# Altium PCB tinyCurrent_Version1.PcbDoc
Units mm, origin at the board's own origin, x right, y up, seen from the top; angles counter-clockwise.
Board outline 49.5 x 79.5 mm, 2 copper layers (Top Layer, Bottom Layer), stack 1.62 mm thick; 39 components, 22 nets, 110 pads, 4 vias.
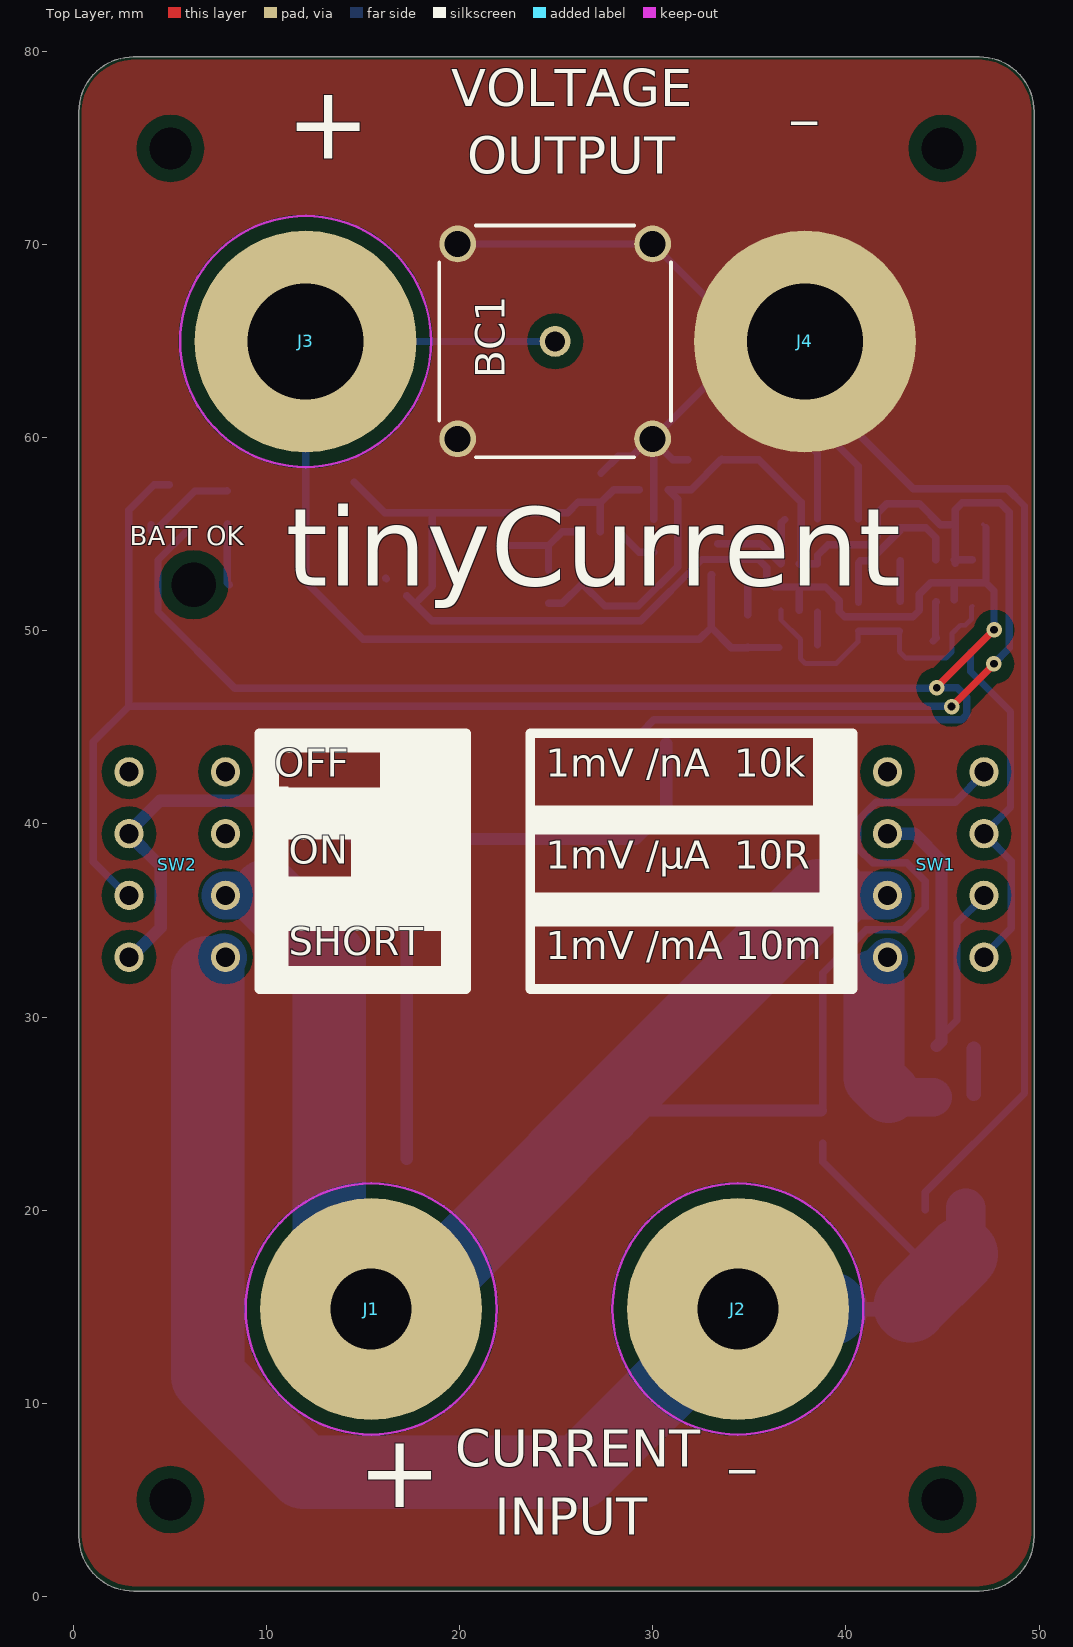
[diagram p0: Top Layer view]
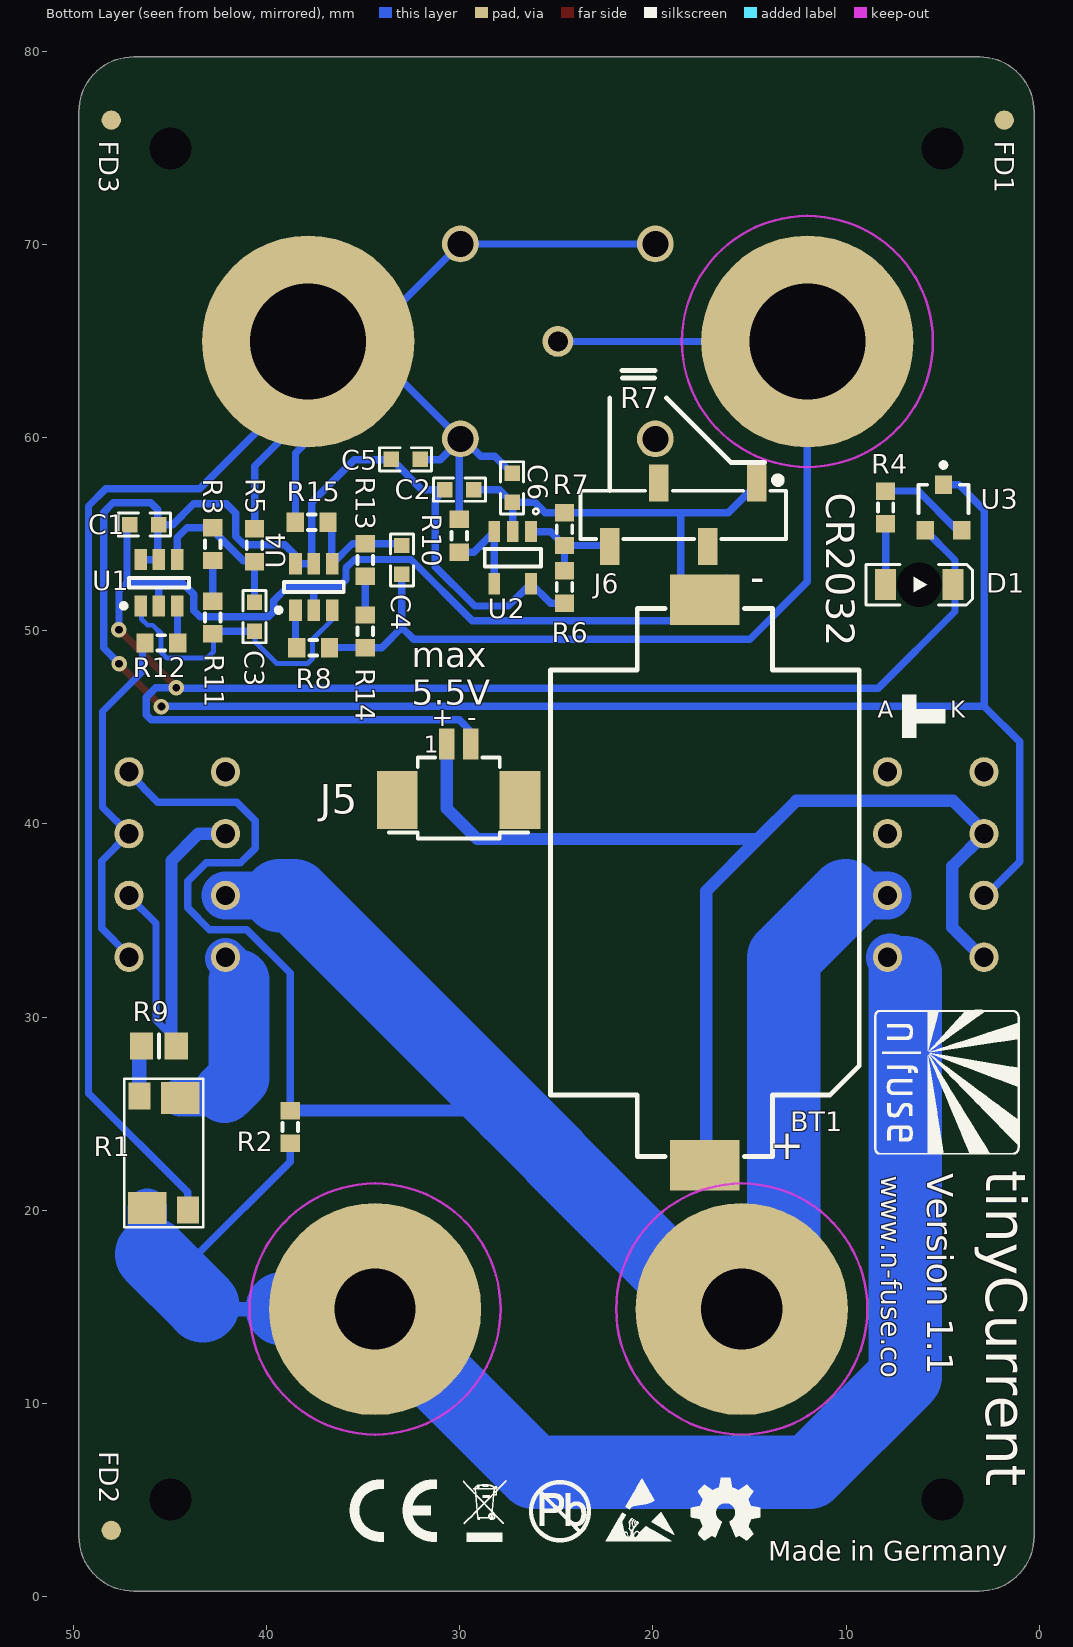
[diagram p1: Bottom Layer view, seen from below]
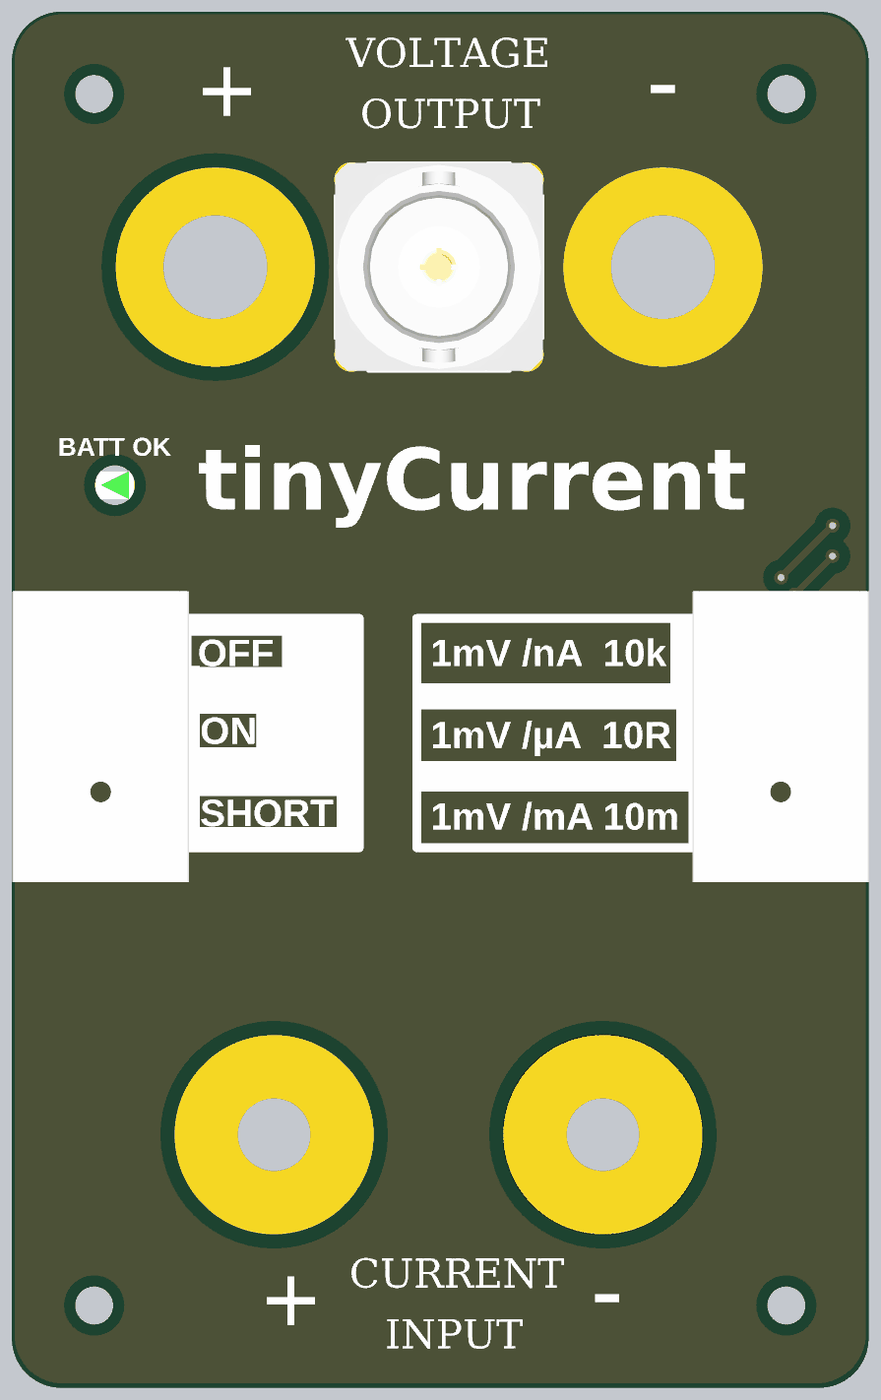
[diagram p2: 3D render of the assembled board from above, using the file's embedded part models]

## Layer stack, top to bottom
Top Solder: solder mask 0.01, Solder Resist, Dk 3.5
Top Layer: signal copper 0.035
Dielectric1: dielectric 1.55, FR-4, Dk 4.8
Bottom Layer: signal copper 0.035
Bottom Solder: solder mask 0.01, Solder Resist, Dk 3.5

## Board outline
0.25,3.1 0.25,76.9 cw(c3.1,76.9) 3.1,79.75 46.9,79.75 cw(c46.9,76.9) 49.75,76.9 49.75,3.1 cw(c46.9,3.1) 46.9,0.25 3.1,0.25 cw(c3.1,3.1)

## Design rules (kind name [scope] priority, off if disabled: settings)
Clearance Clearance_6 [OnLayer('Top Layer') vs OnLayer('Keep-Out Layer')] p1: gap=0.635 ignorepadtopadclearanceinfootprint=FALSE except(0: Arc-Arc Arc-Track Arc-SMDPad Arc-THPad Arc-Via Arc-Fill Arc-Poly Arc-Region Arc-Text Arc-Hole Track-Track Track-SMDPad Track-THPad Track-Via Track-Fill Track-Poly Track-Region Track-Text Track-Hole SMDPad-Hole THPad-Hole Via-Hole Fill-Hole Poly-Hole Region-Hole Text-Hole)
Clearance Clearance_5 [OnLayer('Top Layer') vs OnLayer('Multi-Layer')] p2: gap=0.5 ignorepadtopadclearanceinfootprint=FALSE except(0: Arc-Hole Track-Hole SMDPad-Hole THPad-Hole Via-Hole Fill-Hole Poly-Hole Region-Hole Text-Hole; 0.635: SMDPad-Fill SMDPad-Poly SMDPad-Region SMDPad-Text THPad-Fill THPad-Poly THPad-Region THPad-Text Via-Fill Via-Poly Via-Region Via-Text Fill-Fill Fill-Poly Fill-Region Fill-Text Poly-Poly Poly-Region Poly-Text Region-Region Region-Text Text-Text)
Clearance Clearance_4 [OnLayer('Multi-Layer') vs OnLayer('Multi-Layer')] p3: gap=0.635 ignorepadtopadclearanceinfootprint=FALSE except(0: Arc-Hole Track-Hole SMDPad-Hole THPad-Hole Via-Hole Fill-Hole Poly-Hole Region-Hole Text-Hole; 0.3: THPad-THPad Via-Via)
Clearance Clearance_3 [OnLayer('Bottom Layer') vs OnLayer('Multi-Layer')] p4: gap=0 ignorepadtopadclearanceinfootprint=FALSE except(0.3: SMDPad-Via THPad-Via; 0.635: SMDPad-SMDPad SMDPad-Fill SMDPad-Poly SMDPad-Region SMDPad-Text THPad-THPad THPad-Fill THPad-Poly THPad-Region THPad-Text Via-Via Via-Fill Via-Poly Via-Region Via-Text Fill-Fill Fill-Poly Fill-Region Fill-Text Poly-Poly Poly-Region Poly-Text Region-Region Region-Text Text-Text)
Clearance Clearance_2 [OnLayer('Bottom Layer') vs OnLayer('Keep-Out Layer')] p5: gap=0.635 ignorepadtopadclearanceinfootprint=FALSE except(0: Arc-Arc Arc-Track Arc-SMDPad Arc-THPad Arc-Via Arc-Fill Arc-Poly Arc-Region Arc-Text Arc-Hole Track-Track Track-SMDPad Track-THPad Track-Via Track-Fill Track-Poly Track-Region Track-Text Track-Hole SMDPad-Hole THPad-Hole Via-Hole Fill-Hole Poly-Hole Region-Hole Text-Hole)
Clearance Clearance_1 [OnLayer('Bottom Layer') vs OnLayer('Bottom Layer')] p6: gap=0.635 ignorepadtopadclearanceinfootprint=FALSE except(0: Arc-Hole Track-Hole SMDPad-Hole THPad-Hole Via-Hole Fill-Hole Poly-Hole Region-Hole Text-Hole; 0.1: Arc-Arc Arc-Track Arc-SMDPad Arc-THPad Arc-Via Track-Track Track-SMDPad Track-THPad Track-Via; 0.3: Arc-Text Track-Text SMDPad-SMDPad SMDPad-THPad THPad-THPad)
Clearance [All] p7: gap=0.635 ignorepadtopadclearanceinfootprint=FALSE except(0: Arc-Hole Track-Hole SMDPad-Hole THPad-Hole Via-Hole Fill-Hole Poly-Hole Region-Hole Text-Hole)
ComponentClearance ComponentClearance_6 [InComponent('J5')] p1: gap=0 collisioncheckmode=3 verticalgap=0 showdistances=FALSE
ComponentClearance ComponentClearance_5 [InComponent('R1')] p2: gap=0 collisioncheckmode=3 verticalgap=0 showdistances=FALSE
ComponentClearance ComponentClearance_4 [InComponent('J4')] p3: gap=0 collisioncheckmode=3 verticalgap=0 showdistances=FALSE
ComponentClearance ComponentClearance_3 [InComponent('J3')] p4: gap=0 collisioncheckmode=3 verticalgap=0 showdistances=FALSE
ComponentClearance ComponentClearance_2 [InComponent('J2')] p5: gap=0 collisioncheckmode=3 verticalgap=0 showdistances=FALSE
ComponentClearance ComponentClearance_1 [InComponent('J1')] p6: gap=0 collisioncheckmode=3 verticalgap=0 showdistances=FALSE
ComponentClearance [All] p7: gap=0.254 collisioncheckmode=3 verticalgap=0.254 showdistances=FALSE
FabricationTestPointUsage TestPointUsage [All] p1: valid=0 allowmultiple=FALSE
FabricationTestpoint Testpoint [All] p1: side=3 testpointundercomponent=TRUE minsize=1.016 maxsize=2.54 preferedsize=1.524 minholesize=0 maxholesize=1.016 preferedholesize=0.813 testpointgrid=0.025 allowsidetop=TRUE allowsidebottom=TRUE usegrid=TRUE gridtolerance=0
HoleSize [All] p1: absolutevalues=TRUE maxlimit=5 minlimit=0.025 maxpercent=80.000 minpercent=20.000
PolygonConnect [All] p1: connectstyle=Direct reliefconductorwidth=0.254 reliefentries=4 polygonreliefangle="90 Angle" airgapwidth=0.254
RoutingVias [All] p1: holewidth=0.4 width=0.8 viastyle="Through Hole" minholewidth=0.4 minwidth=0.8 maxholewidth=0.4 maxwidth=0.8
SilkToSolderMaskClearance SilkscreenOverComponentPads [IsPad] p1: minsilkscreentomaskgap=0.254 clearancetoexposedcopper=TRUE
SolderMaskExpansion [All] p1: expansion=0.051
Width [All] p1: maxlimit=3.81 minlimit=0.203 preferedwidth=0.381 minimp=50.000000 maximp=50.000000 favimp=50.000000
25 further rules are at their usual default settings.

## Components (designator, comment, footprint, x,y, rotation, side; value= is the part's Value field where it differs from the comment)
BC1 "J01001A1944" ROS-51K101-400A4_V 24.928,65.006 r90 top
BT1 "79527141" 79527141 17.315,36.969 r270 bottom
C1 "0u1 16V" "WCAP-CSGP_0603, 1.6x0.8x0.8" 46.356,55.512 r180 bottom value=100000pF
C2 "0u1 16V" "WCAP-CSGP_0603, 1.6x0.8x0.8" 30.032,57.325 r180 bottom value=100000pF
C3 "10pF" "WCAP-CSGP_0603, 1.6x0.8x0.8" 40.647,50.743 r270 bottom
C4 "10pF" "WCAP-CSGP_0603, 1.6x0.8x0.8" 33.011,53.68 r270 bottom
C5 "0u1 16V" "WCAP-CSGP_0603, 1.6x0.8x0.8" 32.817,58.892 r0 bottom value=100000pF
C6 "0u1 16V" "WCAP-CSGP_0603, 1.6x0.8x0.8" 27.302,57.417 r90 bottom value=100000pF
D1 "156120GS75000" "WL-SMRW_1206 rectangular_Normal use" 6.2,52.4 r0 bottom
FD1 "FIDUCIAL1X2" FIDUCIAL-1X2#1 0.1,76.4 r90 bottom
FD2 "FIDUCIAL1X2" FIDUCIAL-1X2#2 1.7,3.4 r90 bottom
FD3 "FIDUCIAL1X2" FIDUCIAL-1X2#3 38.7,4 r90 bottom
J1 "4mmBindingPostRed" PIN1#1 15.4,13.9 r0 top locked
J2 "4mmBindingPostBlack" PIN1#2 34.4,13.9 r0 top locked
J3 "4mmBindingPostRed" PIN1#3 15.8,60.7 r0 top locked
J4 "4mmBindingPostBlack" PIN1#4 29.2,70.9 r0 top
J5 "1.25mm JST Connector" 653102131822 30.066,41.353 r180 bottom
J6 "61000413321" 61000413321 18.43,56.016 r0 bottom
R1 "0R01 0.1%" 2512shuntresistor 44.5,25.8 r0 bottom
R2 "10K 0.05%" RESC1608N 38.8,24.3 r270 bottom
R3 "6K8 0.05%" RESC1608N 42.813,54.5 r270 bottom
R4 "470R" RESC1608N 7.95,56.4 r90 bottom
R5 "1K 0.05%" RESC1608N 40.647,54.444 r90 bottom
R6 "100K 1%" RESC1608N 24.585,52.281 r270 bottom
R7 "100K 1%" RESC1608N 24.585,55.281 r90 bottom
R8 "270R" RESC1608N 37.611,49.129 r0 bottom
R9 "10R 0.05%" RESC2012N 45.6,28.5 r0 bottom
R10 "270R" RESC1608N 30.043,54.937 r270 bottom
R11 "2K2 0.05%" RESC1608N 42.813,50.7 r270 bottom
R12 "270R" RESC1608N 45.47,49.383 r180 bottom
R13 "6K8 0.05%" RESC1608N 34.911,53.68 r270 bottom
R14 "2K2 0.05%" RESC1608N 34.911,49.98 r270 bottom
R15 "1K 0.05%" RESC1608N 37.686,55.631 r0 bottom
SW1 "MFP 230" "MFP 230" 45.15,38 r270 top
SW2 "MFP 230" "MFP 230" 5.85,38 r270 top
U1 "MAX4239AUT" SOT-23-CH6_N 45.6,52.5 r90 bottom
U2 "LMV321ILT" SOT95P280X130-5N 27.27,53.799 r270 bottom
U3 "STM809RWX6F" SOT23 4.95,56.4 r180 bottom
U4 "MAX4239AUT" SOT-23-CH6_N 37.572,52.28 r90 bottom

## Footprints (in the part's own frame and the unit in brackets; to place one, negate y for a bottom-side part, rotate by r counter-clockwise, add the part's x,y. Pads: shape width x height; smd on the part's side, far side on the other; paste and mask are expansions set on the pad)
2512shuntresistor [mm]
  rect 2x1.65 smd mask+0.051: 1(0,0) 2(1.7,5.7)
  rect 1.15x1.4 smd mask+0.051: 3(2.1,-0.1) 4(-0.4,5.8)
  silkscreen extent -1.2,-1 2.9,6.7
79527141 [mm] "Battery Holder"
  rect 2.6x3.6 smd: 1(14.65,0) 2(-14.65,0)
  silkscreen extent -14.2,-8 14.2,8, body extent -15.95,-8 15.95,8, height 5.66
61000413321 [mm] "SMT Socket Header, pitch 2.54mm, 4p"
  rect 1x1.91 smd: 1(-3.81,-1.645) 2(-1.27,1.645) 3(1.27,-1.645) 4(3.81,1.645)
  silkscreen extent -5.33,-1.9 5.33,1.25, body extent -5.33,-2.02 5.33,2.03, height 7.5
653102131822 [mm] "1.25mm SMT Male Horizontal Shrouded Header, 2p"
  rect 0.81x1.6 smd: 1(-0.625,2.8) 2(0.625,2.8)
  rect 2.1x3 smd: M1(-3.175,-0.1) M2(3.175,-0.1)
  silkscreen extent -3.6,-2.1 3.61,2.1, body extent -3.63,-2.1 3.62,3.3, height 3.43
FIDUCIAL-1X2#1 [mm]
  rrect100% 1x1 smd paste-0.5: 1(0.07,1.7)
FIDUCIAL-1X2#2 [mm]
  rrect100% 1x1 smd paste-0.5: 1(0,46.37)
FIDUCIAL-1X2#3 [mm]
  rrect100% 1x1 smd paste-0.5: 1(72.47,9.37)
"MFP 230" [mm] "MFP 230 Slide Switch"
  round 1.524 hole 1: 1A(4.9,-3) 1B(4.9,2) 2A(1.7,-3) 2B(1.7,2) 3A(-1.5,-3) 3B(-1.5,2) 4A(-4.7,-3) 4B(-4.7,2)
  body extent -8.27,-5.57 8.53,4.62, height 11.01
PIN1#1 [mm] "Connector; Plug"
  round 11.5 / inner round 10 / far side round 11 hole 4.2 mask+0: 1(0,0.97)
  body extent -5.68,-4.83 5.88,6.75
PIN1#2 [mm] "Connector; Plug"
  round 11.5 / inner round 10 / far side round 11 hole 4.2: 1(0,0.97)
  body extent -5.77,-4.79 5.9,6.82
PIN1#3 [mm] "Connector; Plug"
  round 11.5 / inner round 10 / far side round 11 hole 6 mask+0: 1(-3.8,4.3)
  body extent -9.15,-1.45 2.35,10.05
PIN1#4 [mm] "Connector; Plug"
  round 11.5 / inner round 10 / far side round 11 hole 6 mask+0: 1(8.67,-5.9)
  body extent 3.95,-11.65 15.45,-0.15
RESC1608N [mm] "Chip Resistor, Body 1.6x0.8mm, IPC Medium Density"
  rect 0.9x1 smd: 1(-0.85,0) 2(0.85,0)
  silkscreen extent -0.2,-0.4 0.2,0.4, body extent -0.85,-0.48 0.85,0.48, height 0.6
RESC2012N [mm] "Chip Resistor, Body 2.0x1.3mm, IPC Medium Density"
  rect 1.2x1.4 smd: 1(-0.9,0) 2(0.9,0)
  silkscreen extent 0,-0.6 0,0.6, body extent -1.07,-0.7 1.07,0.7, height 0.65
ROS-51K101-400A4_V [mm]
  round 1.6 hole 1.05: 1(0,0)
  round 1.9 hole 1.35: MH(-5.05,-5.05) MH(-5.05,5.05) MH(5.05,-5.05) MH(5.05,5.05)
  silkscreen extent -6,-6 6,6, body extent -6,-6 6,6, height 15
SOT23 [mm] "SOT-23; 3 Leads; Body 3.1 x 2.5 mm, inc. leads (LxW max), Alternate Lead Configuration"
  rect 0.9x0.95 smd: 1(0,1.175) 2(0.95,-1.175) 3(-0.95,-1.175)
  silkscreen extent -1.3,-0.3 1.3,2.32
SOT95P280X130-5N [mm] "LMV321AS5X"
  rect 1.1x0.6 smd paste-25.4 mask-25.4: 1(-1.35,0.95) 2(-1.35,0) 3(-1.35,-0.95) 4(1.35,-0.95) 5(1.35,0.95)
  silkscreen extent -2.54,-1.46 0.45,1.46, body extent -1.52,-1.5 1.68,1.5, height 0.92
SOT-23-CH6_N [mm]
  rect 1.1x0.65 smd: 1(-1.2,0.95) 2(-1.2,0) 3(-1.2,-0.95) 4(1.2,-0.95) 5(1.2,0) 6(1.2,0.95)
  silkscreen extent -1.32,-1.55 0.25,1.95, body extent -0.9,-1.55 0.9,1.55, height 1.45
"WCAP-CSGP_0603, 1.6x0.8x0.8" [mm] "WCAP-CSGP Ceramic Capacitors, size 0603, body 1.6x0.8x0.8"
  rect 0.8x0.8 smd: 1(-0.75,0) 2(0.75,0)
  silkscreen extent -1.35,-0.6 1.35,0.6, body extent -0.8,-0.4 0.8,0.4, height 0.8
"WL-SMRW_1206 rectangular_Normal use" [mm] "SMD Mono-color Reverse mount LED, body 3.2x1.2mm"
  rect 1.1x1.6 smd: 1(-1.75,0) 2(1.75,0)
  silkscreen extent -2.75,-1.05 2.75,1.05, body extent -1.6,-0.8 1.6,0.8, height 1.2

## Part data
BC1: library part 51K101-400A4, "BNC 50R Straight Jack, Up to 10 GHz, -55 to 155 degC", ComponentLink1Description="Manufacturer URL", ComponentLink1URL=http://www.rosenberger.de, ComponentLink2Description=Datasheet, ComponentLink2URL=http://rosenberger.de/ok/images/documents/db/51K101-400A4.pdf, ComponentLink3Description="Package Specification", ComponentLink3URL=http://rosenberger.de/ok/images/documents/db/51K101-400A4.pdf, ComponentLink4Description="URL Link1", ComponentLink4URL="Series Overview / Design Note:http://rosenberger.de/ok/images/documents/spez/51.pdf", ComponentLink5Description="Webshop / RFQ", ComponentLink5URL=http://www.rosenberger.com/en/contact/sales/, DatasheetVersion=c00, Design Note="Footprint in library is a generic example - only application specific footprint delivers High Performance", Mounting Technology="Through Hole", PackageDescription="50R BNC Straight Jack, 12 x 12 x 15 mm", PackageReference=51K101-400A4, PackageVersion=c00, PartNumber=51K101-400A4
BT1: "Battery Holder WA-BCPH, Battery Type: 2032p", BatteryType=2032, ComponentLink1Description=Manufacturer, ComponentLink1URL=http://www.we-online.de, ComponentLink2Description=Datasheet, ComponentLink2URL=http://katalog.we-online.de/em/datasheet/79527141.pdf, PartNumber=79527141, PublishedDate="Nov. 2016", Publisher="Wurth Elektronik"
C1 C2 C5 C6: library part "WCAP-CSGP, 885012206046", "WCAP-CSGP Ceramic Capacitors, 0603, 100000pF", PartNumber=885012206046, RatedVoltage="16V DC", CeramicType=X7R, ComponentLink1Description=Manufacturer, ComponentLink1URL=http://www.we-online.de, ComponentLink2Description=Datasheet, ComponentLink2URL=http://katalog.we-online.com/pbs/datasheet/885012206046.pdf, PublishedDate="Aug 2016", Publisher="Wurth Elektronik", Size=0603
C3 C4: library part "WCAP-CSGP, 885012006051", "WCAP-CSGP Ceramic Capacitors, 0603, 10pF", PartNumber=885012006051, RatedVoltage="50V DC", CeramicType=NP0, ComponentLink1Description=Manufacturer, ComponentLink1URL=http://www.we-online.de, ComponentLink2Description=Datasheet, ComponentLink2URL=http://katalog.we-online.com/pbs/datasheet/885012006051.pdf, PublishedDate="Aug 2016", Publisher="Wurth Elektronik", Size=0603
D1: "WL-SMRW SMD Mono-color Reverse mount Waterclear, size 1206 rectangular, Green", EmittingColor=Green, ForwardVoltage="3.3 V", ComponentLink1Description=Manufacturer, ComponentLink1URL=http://www.we-online.de, ComponentLink2Description=Datasheet, ComponentLink2URL=http://katalog.we-online.de/led/datasheet/156120GS75000.pdf, PartNumber=156120GS75000, PeakWavelength="520 nm", PublishedDate="Jan. 2017", Publisher="Wurth Elektronik", Size="1206 rectangular", ViewingAngle=140°
FD1 FD2 FD3: "Fiducial Alignment Points    Point-of-reference for pick-and-place machines and other optical instruments."
J5: library part 653102131822, "WR-WTB 1.25mm SMT Male Horizontal Shrouded Header, 2p", ComponentLink1Description=Manufacturer, ComponentLink1URL=http://www.we-online.de, ComponentLink2Description=Datasheet, ComponentLink2URL=http://katalog.we-online.de/em/datasheet/6531xx131822.pdf, Part Number=653102131822, Pin Number=2, Pitch="1.25 mm", Published Date="June 2017", Publisher="Wurth Elektronik"
J6: "WR-PHD 2.54 mm SMT Socket Header, 4p", Rated Current=3A, Withstanding Voltage="500V AC", Working Voltage="250V AC", ComponentLink1Description=Manufacturer, ComponentLink1URL=http://www.we-online.de, ComponentLink2Description=Datasheet, ComponentLink2URL=http://katalog.we-online.de/em/datasheet/6100xx13321.pdf, Part Number=61000413321, Pin Number=4, Pitch=2.54mm, Published Date="August 2017", Publisher="Wurth Elektronik"
R1: library part 1206currentShunt, "1206 Current Shunt"
R2 R3 R4 R5 R6 R7 R8 R9 R10 R11 R12 R13 R14 R15: library part D-100-0004, Power Rating="125 mW", Resistance="75 R", Tolerance="1 %", Category=Resistor, Mounting Technology="Surface Mount", Status=Production
SW1 SW2: "Slide Switch"
U1 U4: library part MCP6273T-E/CH, "170 uA, 2 MHz Rail-to-Rail Operational Amplifier, 6-Pin SOT-23, Extended Temperature, Tape and Reel", Supplier Part Number 1=MCP6273T-E/CHTR-ND, Code_IPC=SOT26A-6, ComponentLink1Description=Datasheet, ComponentLink1URL=http://ww1.microchip.com/downloads/en/DeviceDoc/21810f.pdf, ComponentLink2Description="Packaging Specification", ComponentLink2URL=http://www.microchip.com/stellent/groups/techpub_sg/documents/packagingspec/en012702.pdf, ComponentLink3Description="Microchip.com Home", ComponentLink3URL=http://www.microchip.com/, DatasheetVersion="revF, Mar-2008", PackageDescription="6-Lead Plastic Small Outline Transistor (CH) [SOT-23]", PackageReference=SOT-23-CH6, PackageVersion="revBB, Aug-2009", Published=29-Jan-2009, Publisher="Altium Limited", Supplier 1=Digi-Key, Supplier 2=Digi-Key, Supplier 3=Digi-Key, Supplier Part Number 2=MCP6273T-E/CHCT-ND, Supplier Part Number 3=MCP6273T-E/CHDKR-ND
U2: library part Component_1_1
U3: library part VoltageSupervisor

## Free pads (board coordinates)
  round 0 hole 2.3 unplated paste+2.032 mask+1.05: 0(6.2,52.4)
  round 0 hole 2.2 unplated: 1(5,5) 2(45,5) 3(5,75) 4(45,75)
  round 0 on Mech16 paste+0 mask+0: 1(21.2,53.746)

## Via types
v1: diameter 0.8, hole 0.4, Top Layer to Bottom Layer, tented both sides, 4 vias

## Nets (pads, with @x,y where several pads share a name; then routed paths per layer and width w, separated by ;. In a path a pad name is that pad's centre, name@x,y a point inside that pad or via, vN(x,y) a via of type N, cw(c..) or ccw(c..) an arc to the next point about the centre after c; other vN are vias at no path point)
+IN: J1.1 R2.1 SW1.2A SW1.4B SW2.2B | length 102.7
  Top Layer w0.381: SW1.4B@47.102,42.7 SW1.4B@47.3,42.7
  Bottom Layer w0.381: 26.35,25.15 27.461,25.15 ; R2.1@38.7,25.15 38.75,25.2 38.8,25.25 38.8,32.278 41.051,34.529 42.982,34.529 44.115,35.662 44.115,37.028 43.152,37.991 41.372,37.991 40.615,38.748 40.615,40.173 41.57,41.128 45.653,41.128 47.172,42.647 SW1.4B@47.239,42.647
  Bottom Layer w0.635: 27.461,25.15 R2.1@38.7,25.15
  Bottom Layer w2.5: SW2.2B 10,36.3 ; 39.358,36.3 SW1.2A
  Bottom Layer w2.54: 10,36.3 10.006,36.294 ; 39.347,36.289 39.358,36.3
  Bottom Layer w3.81: 10.006,36.294 13.218,33.082 13.218,16.927 15.329,14.816 17.175,14.816 25.029,22.669 25.029,22.718 27.461,25.15 38.6,36.289 39.347,36.289
+V: C1.2 C2.1 C5.2 R6.2 SW2.2A U1.5 U1.6 U2.5 U3.1 U4.5 U4.6 | length 120.2
  Top Layer w0.381: v1(45.469,46.083) 47.666,48.28 v1(47.666,48.301)
  Bottom Layer w0.203: U4.5 U4.5@37.672,53.58
  Bottom Layer w0.381: SW2.2A@2.5,36.3 2.5,36.55 1,38.05 1,44.259 2.83,46.088 2.83,46.093 ; 2.83,56.248 2.83,46.093 ; 2.83,56.259 4.146,57.575 U3.1 ; R6.2 25.302,51.431 U2.5 26.339,52.449 27.493,51.295 29.238,51.295 31.275,53.332 31.275,56.832 C2.1 31.974,57.325 C5.2@33.519,58.87 ; C5.2@33.554,58.905 C5.2@33.519,58.87 ; U4.5 U4.6 38.522,53.917 39.076,54.47 41.184,54.47 41.613,54.9 41.613,56.1 42.107,56.594 43.806,56.594 44.888,55.512 C1.2 ; U4.5@37.672,53.58 37.672,56.68 35.482,58.87 C5.2@33.519,58.87 ; v1(45.469,46.083) 45.552,46.083 45.563,46.093 45.527,46.129 45.491,46.093 2.83,46.093 ; U1.5 U1.5@45.656,53.7 ; U1.5@45.656,53.512 U1.5@45.656,53.7 ; U1.6 U1.5@45.656,53.7 ; v1(47.666,48.301) 47.65,48.301 48.466,49.116 48.466,56.159 47.981,56.645 46.015,56.645 45.657,56.286 45.657,55.563 C1.2 ; C1.2 45.656,55.462 U1.5@45.656,53.7
-IN: J2.1 R1.2 R2.2 SW2.1B | length 80.9
  Top Layer w3.81: J2.1@34.29,15.055 J2.1@34.46,15.055
  Bottom Layer w0: 40.853,14.836 40.88,14.863
  Bottom Layer w0.381: J2.1@33.798,14.893 J2.1 ; R2.2 38.8,22.5 43.6,17.7 45.607,17.7 45.973,17.7 ; 43.186,14.863 43.238,14.915
  Bottom Layer w0.75: 40.88,14.863 43.186,14.863
  Bottom Layer w2.032: 45.607,17.7 46.2,18.293 R1.2
  Bottom Layer w2.5: 6.924,32.301 SW2.1B@7.704,33.081
  Bottom Layer w3.81: 6.924,32.301 6.924,11.389 11.895,6.419 26.19,6.419 34.427,14.656 34.427,14.658 34.334,14.693 33.798,14.893 J2.1@39.219,14.893 ; J2.1@34.584,16.104 J2.1@34.668,16.167 ; 43.324,15.051 45.973,17.7
-V: BT1.2 C1.1 C2.2 C6.1 D1.1 J5.2 J6.1 R7.2 U1.2 U2.2 U3.3 U4.2 | length 136.4
  Top Layer w0.381: v1(44.696,47.061) 44.696,47.03 44.681,47.015 44.648,47.048 44.658,47.048 v1(47.671,50.061) v1@47.661,50.061
  Bottom Layer w0.203: 45.6,52.5 45.602,52.502 ; C1.1 C1.1@47.256,55.362
  Bottom Layer w0.381: U3.3 4.35,53.675 4.35,51.01 8.326,47.033 44.823,47.033 44.795,47.061 45.771,47.061 46.261,46.571 46.261,45.664 46.002,45.405 30.038,45.405 J5.2@29.4,44.767 ; J6.1@14.526,57.705 16.101,56.131 18.567,56.131 ; BT1.2@16.162,52.728 BT1.2@16.195,52.695 ; BT1.2@17.239,51.827 18.541,50.526 29.357,50.526 32.54,53.708 35.463,53.708 35.903,53.269 35.903,52.647 36.27,52.28 37.572,52.28 ; BT1.2@17.875,51.616 18.567,52.309 18.567,56.131 ; R7.2@24.385,56.131 R7.2 ; R7.2@24.599,56.116 R7.2 ; U2.2 27.27,56.634 C6.1 ; C2.2 27.961,57.325 C6.1 ; U4.2 37.572,52.28 ; U1.2@45.6,51.62 45.6,52.5 44.4,52.5 43.8,51.9 43.8,51.062 43.47,50.731 39.926,50.731 39.647,51.011 39.647,51.57 38.937,52.28 37.572,52.28 ; 45.602,52.502 47.2,52.502 ; C1.1@47.256,55.362 47.256,52.498 47.671,52.083 v1(47.671,50.061) ; 18.567,56.131 R7.2 ; R7.2 25.575,56.131 26.11,56.667 C6.1
B+: BT1.1 J5.1 SW2.1A SW2.3A | length 59
  Bottom Layer w0.381: SW2.3A@2.7,39.5 SW2.3A@2.8,39.5 ; SW2.1A@3.287,33.373 SW2.1A@3.287,33.434
  Bottom Layer w0.635: SW2.1A@2.5,33.1 2.572,33.1 SW2.1A@2.636,33.164 ; SW2.3A@2.5,39.5 2.619,39.5 2.66,39.54 2.735,39.615 2.85,39.615 2.865,39.615 4.45,41.2 12.572,41.2 14.553,39.219 ; SW2.3A@2.8,39.5 4.493,37.807 4.493,34.641 SW2.1A@3.287,33.434 ; BT1.1@17.244,22.649 17.244,36.528 14.553,39.219 ; J5.1 30.691,40.8 29.11,39.219 14.553,39.219
NetBC1_1: BC1.1 C4.2 J3.1 R8.1 R14.2 | length 55
  Bottom Layer w0.381: BC1.1@24.895,64.96 24.935,65 J3.1 12,52.549 14.976,49.573 32.404,49.573 33.011,50.18 ; C4.2 C4.2@33.011,52.918 ; C4.2@33.058,52.918 C4.2@33.011,52.918 ; R14.2 34.061,49.13 33.011,50.18 ; R14.2@34.91,49.156 34.911,49.156 R14.2@35.266,49.147 ; R14.2@34.911,49.173 34.914,49.173 R14.2@35.266,49.147 ; R8.1@36.528,49.147 R14.2@35.266,49.147 ; 33.011,50.18 C4.2@33.011,52.918
NetC3_1: C3.1 R3.1 R5.1 U1.4 | length 8.3
  Bottom Layer w0.203: R5.1@40.647,53.551 R5.1@40.647,53.558 ; R5.1@40.647,53.65 R5.1 R5.1@40.647,53.558 ; R5.1@40.724,53.635 R5.1@40.647,53.558 ; R3.1@42.813,55.216 R3.1
  Bottom Layer w0.381: C3.1 R5.1@40.647,53.551 ; R5.1@40.724,53.635 41.232,53.635 R3.1@42.813,55.216 ; R3.1 44.142,55.35 44.65,54.842 U1.4
NetC3_2: C3.2 R11.2 U1.1 U4.3 | length 16.1
  Bottom Layer w0.203: U1.1@46.5,51.25 U1.1
  Bottom Layer w0.254: U4.3 36.622,50.586 37.643,49.566 37.643,48.565 37.889,48.318 39.505,48.318 40.617,49.431 C3.2@40.617,49.926 ; C3.2 C3.2@40.653,49.987 ; R11.2@42.771,49.987 42.771,48.925 43.094,48.603 45.189,48.603 45.494,48.908 45.494,49.873 45.921,50.3 46.182,50.3 46.5,50.617 U1.1@46.5,51.25
  Bottom Layer w0.381: C3.2@40.653,49.987 R11.2@42.771,49.987
NetC4_1: C4.1 R13.1 R15.1 U4.4 | length 6.1
  Bottom Layer w0.381: C4.1@33.351,54.516 R13.1@34.951,54.516 ; R13.1@34.901,54.522 R13.1@34.909,54.531 ; R13.1 35.572,54.53 U4.4 36.65,53.507 36.65,55.607 R15.1@36.822,55.78
NetD1_2: D1.2 R4.1 | length 3.2
  Bottom Layer w0.381: R4.1 7.945,55.545 7.945,52.505 8,52.45 D1.2@8.05,52.4
NetJ6_4: J6.4 R6.1 R7.1 U2.1 | length 5.7
  Bottom Layer w0.381: J6.4@22.146,54.415 J6.4@22.162,54.431 ; J6.4 22.3,54.431 R7.1 ; R6.1 R7.1 ; U2.1 25.303,55.149 R7.1
NetR1_1: R1.1 SW1.1A | length 9.7
  Bottom Layer w1.27: 41.232,32.113 41.448,31.898 ; SW1.1A@42.15,33.031 SW1.1A
  Bottom Layer w2: 42.589,25.843 R1.1@44.489,25.843
  Bottom Layer w2.1: 41.232,32.113 SW1.1A@42.15,33.031
  Bottom Layer w3.175: 41.448,31.898 41.448,26.852 42.2,26.1
NetR1_3: R1.3 R9.2 | length 2.4
  Bottom Layer w0.75: R1.3@46.608,26.011 R9.2@46.608,28.361
NetR3_2: R3.2 R11.1 | length 2.1
  Bottom Layer w0.381: R11.1 R3.2
NetR4_2: R4.2 U3.2 | length 5.1
  Bottom Layer w0.381: U3.2@4,55.5 U3.2 4.237,55.225 6.262,57.25 R4.2 R4.2@7.93,57.27
NetR8_2: R8.2 U4.1 | length 1.7
  Bottom Layer w0.381: R8.2@38.522,49.289 U4.1@38.522,50.97
NetR9_1: R9.1 SW1.2B SW1.3A | length 21.3
  Bottom Layer w0.381: R9.1@45.037,28.937 45.037,29.116 45.753,29.832 45.753,34.854 47.137,36.238 47.15,36.238 SW1.2B@47.3,36.238
  Bottom Layer w0.635: SW1.3A@42.3,39.5 43.543,39.5 44.945,38.097 44.945,28.745 R9.1
NetR10_2: R10.2 U2.3 U2.4 | length 5
  Bottom Layer w0.381: U2.4 U2.3 29.282,54.087 R10.2
NetR12_1: R12.1 SW1.1B SW1.3B | length 18.4
  Bottom Layer w0.254: R12.1@46.449,48.899 R12.1@46.45,48.9 ; SW1.3B@47.223,39.573 47.297,39.5 47.297,39.474 SW1.3B@47.237,39.413
  Bottom Layer w0.381: R12.1@46.449,48.899 46.449,47.902 48.524,45.827 48.524,40.874 SW1.3B@47.223,39.573 ; SW1.1B@47.212,33.054 47.212,33.237 48.567,34.592 48.567,38.083 SW1.3B@47.237,39.413
NetR12_2: R12.2 U1.3 | length 2.2
  Bottom Layer w0.381: R12.2@44.52,49.483 44.685,49.647 44.635,49.647 44.635,51.491 U1.3@44.668,51.524
NetR13_2: R13.2 R14.1 | length 2
  Bottom Layer w0.381: R14.1 R13.2
VGND: BC1.MH C5.1 C6.2 J4.1 R1.4 R5.2 R10.1 R15.2 | length 108
  Bottom Layer w0.381: BC1.MH@19.885,70.05 29.985,70.05 34.95,65.085 35.291,65.085 35.376,65 J4.1 ; C6.2 28.191,59.055 28.931,59.055 29.831,59.956 BC1.MH@29.978,59.956 ; R10.1 BC1.MH@30.043,59.843 ; C5.1@31.807,58.87 31.017,58.87 BC1.MH@30.043,59.843 ; J4.1@35.035,65 29.985,59.95 29.985,59.901 BC1.MH@30.043,59.843 ; R15.2@38.522,55.8 38.522,59.218 37.87,59.87 J4.1@37.87,61.317 ; 40.64,55.808 40.64,58.547 J4.1@37.87,61.317 ; R1.4 44.115,20.015 44.115,20.912 49.246,26.043 49.246,56.474 48.357,57.363 43.482,57.363 37.97,62.876 37.97,65.1 J4.1 ; J4.1@37.87,61.317 J4.1
pads on no net: FD1.1 FD2.1 FD3.1 J5.M1 J5.M2 J6.2 J6.3 SW1.4A SW2.3B SW2.4A SW2.4B

## Polygon pours and split planes (outlines as drawn)
VGND on Top Layer "GND_pour" (solid, pour order 8): 46.874,79.6 cw(c46.874,76.874) 49.6,76.874 49.6,3.392 cw(c46.708,3.392) 46.708,0.5 3.191,0.5 cw(c3.191,3.291) 0.4,3.291 0.4,76.857 cw(c3.143,76.857) 3.143,79.6

## Keep-outs
Keep-Out Layer:
  circle w0.127: c34.4,14.87 r6.505
  circle w0.127: c12,65 r6.505
  circle w0.127: c15.4,14.87 r6.505

## Silkscreen, mask and mechanical layers (free items; w line width, h text height)
Top Overlay:
  rectangle: 39.352,31.595 40.366,35.022
  rectangle: 39.545,34.201 39.835,34.78
  rectangle: 19.015,31.5 20.215,34.6
  rectangle: 23.843,39.45 40.343,40.95
  rectangle: 23.843,34.7 40.343,36.45
  rectangle: 38.628,36.2 40.343,40.2
  rectangle: 15.865,34.45 20.115,44.7
  rectangle: 9.615,31.45 20.015,32.45
  rectangle: 9.615,32.45 11.115,41.95
  rectangle: 10.615,39.45 16.115,41.7
  rectangle: 14.365,34.45 16.115,39.7
  rectangle: 10.865,34.45 14.865,36.95
  rectangle: 9.615,43.7 16.115,44.45
  rectangle: 9.615,41.7 10.615,44.2
  rectangle: 38.29,40.2 40.343,44.7
  lines w0.381: 10.615,41.7 16.115,41.7 ; 10.935,32.45 19.115,32.45
  lines w0.508: 10.615,39.45 16.115,39.45 ; 9.615,31.45 9.615,44.7 20.315,44.7 20.315,31.45 9.615,31.45 ; 23.643,31.45 23.643,44.7 40.343,44.7 40.343,31.45 23.643,31.45
  lines w0.635: 10.365,36.95 16.365,36.95
  text "VOLTAGE" at 19.548,76.551 h3.3
  text "-" at 36.9,73.77 h6.5
  text "+" at 11,73.229 h6.5
  text "OUTPUT" at 20.372,73.038 h3.3
  text "BATT OK" at 2.9,54.1 h1.7
  text "tinyCurrent" at 10.973,51 h7
  text "OFF" at 10.365,41.95 h2.5
  text "1mV /nA  10k" at 24.443,41.95 h2.5
  text "ON" at 11.115,37.45 h2.5
  text "1mV /µA  10R" at 24.443,37.2 h2.5
  text "SHORT" at 11.115,32.7 h2.5
  text "1mV /mA 10m" at 24.443,32.5 h2.5
  text "CURRENT" at 19.743,6.038 h3.3
  text "-" at 33.7,3.9 h6.5
  text "+" at 14.7,3.359 h6.5
  text "INPUT" at 21.806,2.525 h3.3
Bottom Overlay:
  drawing of 6615 lines, arcs and shapes, not listed
  text "R7" at 21.704,61.552 h1.1
  text "CR2032" at 11.527,57.175 h2.54 r90
  text "-" at 14.209,52.037 h1.52
  text "max / 5.5V" at 32.494,46.172 h1.3
  text "K" at 4.6,45.2 h1.5
  text "A" at 8.35,45.2 h1.5
  text "-" at 29.136,45.062 h1
  text "+" at 30.333,45.062 h1
  text "+" at 12.156,22.636 h1.52
  text "tinyCurrent" at 3.439,22.047 h3.6 r90
  text "Version 1.1" at 6.231,21.905 h2.3 r90
  text "www.n-fuse.co" at 8.54,21.763 h1.78 r90
  text "Made in Germany" at 14.034,1.479 h1.75
Mechanical 1:
  lines w0.127: 0.25,3.1 0.25,76.9 ; 0.25,3.25 ccw(c3.25,3.25) 3.25,0.25 ; 0.25,76.75 cw(c3.25,76.75) 3.25,79.75 ; 3.1,0.25 46.9,0.25 ; 3.1,79.75 46.9,79.75 ; 46.75,0.25 ccw(c46.75,3.25) 49.75,3.25 ; 46.75,79.75 cw(c46.75,76.75) 49.75,76.75 ; 49.75,3.1 49.75,76.9

## Text inside footprints (layer, text, board x,y; h text height)
J5: Bottom Overlay "1" at 31.866,43.703 h0.89